# EAGLE board Remote (EAGLE 5.04)
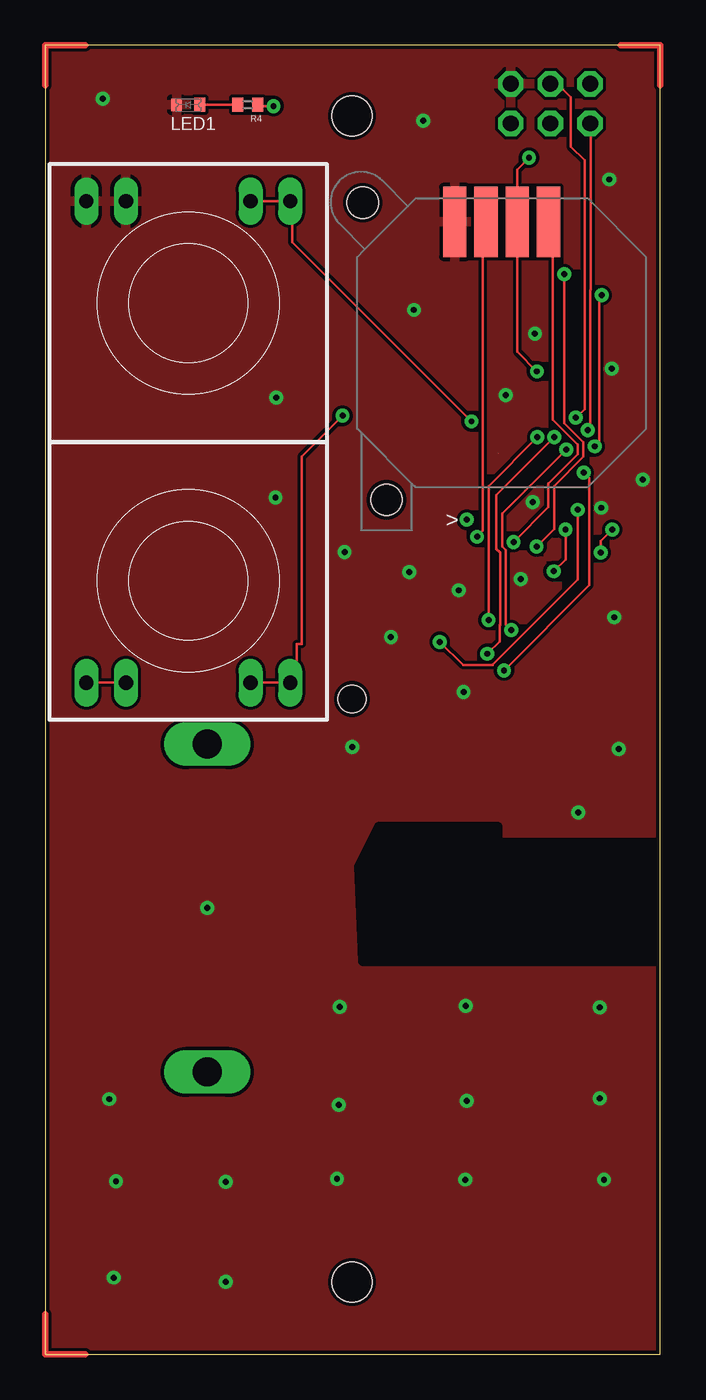
[diagram p0: board, top side]
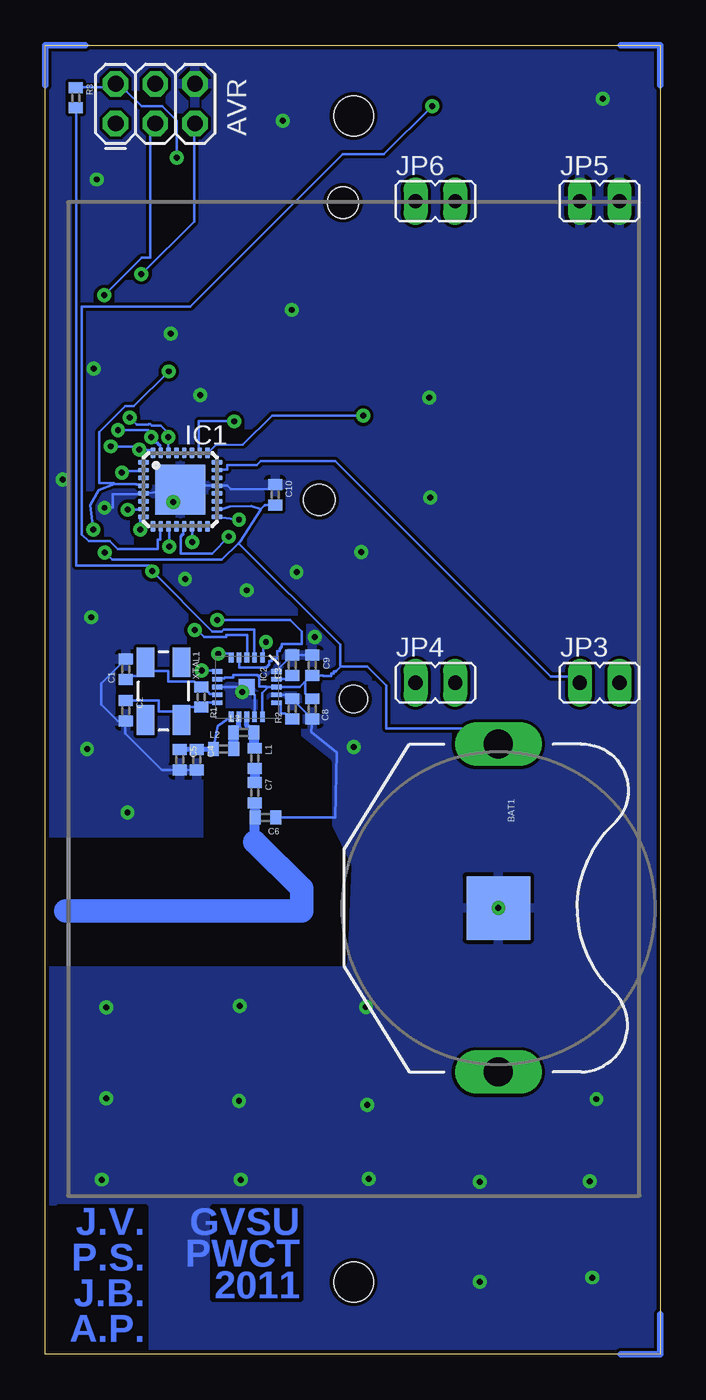
[diagram p1: board, bottom side, seen from below]

Size 39.37 x 83.82 mm. Coordinates in mm from the lower left corner, seen from the top.
Outline: 39.37,0 39.37,83.82 0,83.82 0,0 39.37,0
Copper layers (1*16): Top 0.035mm / dielectric 1.5mm / Bottom 0.035mm
Design rules "SparkFun *": minimum track width 6mil, minimum drill 15mil, track to track 8mil, track to pad 8mil, pad to pad 7mil, via to via 8mil, smd to smd 8mil, copper to edge 10mil, drill to drill 8mil, minimum pad ring 12mil, minimum via ring 10mil, stop-mask expansion 4mil, vias tented up to drill 20mil, thermal gap 10mil
Holes 1.78 mm at 19.63,41.96
Holes 2.54 mm at 19.63,79.3 19.63,4.62
tRestrict: area 20.1,25.1 to 39.4,33.8
bRestrict: area 20.1,25.1 to 39.4,40.9

## Footprints (pad centres in the part's own frame; a part is rotated, then mirrored left to right if it is on the bottom)
2X3 = drill 1.016 octagon: 1 0,0; 2 0,2.54; 3 2.54,0; 4 2.54,2.54; 5 5.08,0; 6 5.08,2.54
BATTCOM_20MM_PTH = drill 1.854 long: 1 -10.5,0; 3 10.5,0 | smd 4.064 x 4.064: 2 0,0
C0402 = smd 0.7 x 0.9: 1 -0.65,0; 2 0.65,0
MLF32-TH = smd 0.7 x 0.3: 1 -2.35,1.75; 2 -2.35,1.25; 3 -2.35,0.75; 4 -2.35,0.25; 5 -2.35,-0.25; 6 -2.35,-0.75; 7 -2.35,-1.25; 8 -2.35,-1.75; 17 2.35,-1.75; 18 2.35,-1.25; 19 2.35,-0.75; 20 2.35,-0.25; 21 2.35,0.25; 22 2.35,0.75; 23 2.35,1.25; 24 2.35,1.75 | smd 0.3 x 0.7: 9 -1.75,-2.35; 10 -1.25,-2.35; 11 -0.75,-2.35; 12 -0.25,-2.35; 13 0.25,-2.35; 14 0.75,-2.35; 15 1.25,-2.35; 16 1.75,-2.35; 25 1.75,2.35; 26 1.25,2.35; 27 0.75,2.35; 28 0.25,2.35; 29 -0.25,2.35; 30 -0.75,2.35; 31 -1.25,2.35; 32 -1.75,2.35 | smd 3.2 x 3.2: TH 0,0
QFN20 = smd 1 x 1: 0 0,0 | smd 0.65 x 0.3: 1 -1.9,1; 2 -1.9,0.5; 3 -1.9,0; 4 -1.9,-0.5; 5 -1.9,-1; 11 1.9,-1; 12 1.9,-0.5; 13 1.9,0; 14 1.9,0.5; 15 1.9,1 | smd 0.3 x 0.65: 6 -1,-1.9; 7 -0.5,-1.9; 8 0,-1.9; 9 0.5,-1.9; 10 1,-1.9; 16 1,1.9; 17 0.5,1.9; 18 0,1.9; 19 -0.5,1.9; 20 -1,1.9
JP1 = drill 0.914 long: 1 0,-1.27; 2 0,1.27
JOYSTICK-PSP1000 = smd 1.5 x 4.5: GND -3,7.75; VCC 1,7.75; X 3,7.75; Y -1,7.75 | hole 2: -8.89,8.985; -7.375,-10.06
0603LED = smd 0.9 x 0.7: 1 0,0.75 | smd 0.8 x 0.7: 2 0,-0.75
CRYSTAL-SMD-5X3 = smd 1.9 x 1.1: 1 -1.85,-1.15; 2 1.85,-1.15; 3 1.85,1.15; 4 -1.85,1.15

## Placement (x,y rotation side)
AVR  AVR_PRG  [2X3]  34.87,78.82 0 bottom
BAT1  20mm Coincell  [BATTCOM_20MM_PTH]  10.36,28.57 270 bottom
C1  22pF  [C0402]  34.22,43.87 90 bottom
C2  22pF  [C0402]  34.22,41.2 270 bottom
C3  33nF  [C0402]  23.55,44.12 90 bottom
C4  2.2nF  [C0402]  29.67,38.06 270 bottom
C5  4.7pF  [C0402]  30.78,38.06 270 bottom
C6  1.0pF  [C0402]  25.28,34.37 180 bottom
C7  1.5pF  [C0402]  25.96,35.96 270 bottom
C8  10nF  [C0402]  22.28,41.33 90 bottom
C9  1nF  [C0402]  22.28,44.12 270 bottom
C10  0.1uF  [C0402]  24.66,55.04 270 bottom
IC1  ATTINY261V-10MU  [MLF32-TH]  30.73,55.37 0 bottom
IC2  NRF24L01SMD  [QFN20]  26.48,42.72 270 bottom
JP3  [JP1]  3.89,43 270 bottom
JP4  [JP1]  14.4,43 270 bottom
JP5  [JP1]  3.89,73.84 270 bottom
JP6  [JP1]  14.4,73.84 270 bottom
JSTICK1  JOYSTICK-PSP1000  [JOYSTICK-PSP1000]  29.21,64.77 0 top
L1  3.9nH  [C0402]  25.96,38.16 270 bottom
L2  2.7nH  [C0402]  27.96,38.76 0 bottom
L3  8.2nH  [C0402]  26.68,39.8 0 bottom
LED1  CHIPLED  [0603LED]  9.14,80.01 270 top
R1  1M  [C0402]  29.4,42.09 270 bottom
R2  22K  [C0402]  23.55,41.33 90 bottom
R3  100K  [C0402]  37.41,80.47 270 bottom
R4  220  [C0402]  12.95,80.01 180 top
XTAL1  16MHz  [CRYSTAL-SMD-5X3]  31.81,42.47 270 bottom

## Library data of the parts
AVR BAT1 C1-C10 IC2 JSTICK1 L1-L3 R1-R4 XTAL1 = SparkFun
IC1 LED1 = PAS
JP3-JP6 = jumper

## Nets
ANT: C6.2 C7.2
CE: IC1.7 IC2.1
CS: IC1.8 IC2.2 R3.2
DOWN: IC1.23 JP3.1 JP3.2
GND: AVR.6 BAT1.2 C1.2 C2.2 C3.2 C4.2 C5.2 C6.1 C8.1 C9.1 C10.1 IC1.5 IC1.21 IC1.TH IC2.0 IC2.8 IC2.14 IC2.17 IC2.20 JP5.1 JP5.2 JSTICK1.GND LED1.2 R2.2
IRQ: IC1.2 IC2.6
JSX: IC1.14 JSTICK1.X
JSY: IC1.13 JSTICK1.Y
MISO: AVR.1 IC1.31 IC2.5
MOSI: AVR.4 IC1.30 IC2.4
N$1: C1.1 IC2.9 R1.1 XTAL1.1
N$2: C2.1 IC2.10 R1.2 XTAL1.3
N$3: IC2.12 L2.2 L3.1
N$4: IC2.16 R2.1
N$5: C3.1 IC2.19
N$6: IC2.13 L1.1 L3.2
N$7: C4.1 C5.1 IC2.11 L2.1
N$8: LED1.1 R4.2
N$9: C7.1 L1.2
REDBUTTON: IC1.26 JP6.1 JP6.2
RST: AVR.5 IC1.11
SCK: AVR.3 IC1.32 IC2.3
SPARE: IC1.17
STATUS: IC1.10 R4.1
UP: IC1.25 JP4.1 JP4.2
VCC: AVR.2 BAT1.1 C8.2 C9.2 C10.2 IC1.4 IC1.18 IC2.7 IC2.15 IC2.18 JSTICK1.VCC R3.1

## Tracks (layer width: path | path; a pad name or v marks a point on that pad's centre or on a via)
ANT
  Bottom 0.635: 25.97,32.81 25.97,34.37 C6.2 25.93,35.31 C7.2
  Bottom 1.5: 25.97,32.81 22.97,29.81 22.97,28.38 38.06,28.38
CE  (via drill 0.38)
  Top 0.152: v25.25,45.62 26.75,44.12 28.65,44.12 28.65,44.17 34.09,49.61 v34.09,54.08
  Bottom 0.152: v25.25,45.62 25.43,45.62 25.43,44.93 IC2.1 | v34.09,54.08 33.43,54.08 IC1.7
CS  (via drill 0.38)
  Top 0.152: v32.54,50.14 33.3,50.9 v33.3,52.81
  Bottom 0.152: v33.3,52.81 33.3,53.49 IC1.8 | IC2.2 25.98,44.93 25.98,46.41 27.94,46.41 28.07,46.28 28.68,46.28 v32.54,50.14 32.77,50.52 37.39,50.52 37.39,79.48 R3.2
DOWN
  Top 0.152: JP3.2 3.35,43 4.42,43 JP3.1
  Bottom 0.152: IC1.23 28.04,56.67 27.74,56.67 27.74,56.95 25.83,56.95 25.58,57.2 20.83,57.2 7.01,43.38 5.89,43.38 JP3.1
GND  (via drill 0.38)
  Bottom 0.152: IC2.17 24.26,42.22 24,42.22 R2.2 23.55,41.95 C8.1 22.35,39.85 20.73,38.53 20.8,34.37 C6.1 | IC2.20 | IC2.20 24.58,43.88 | IC2.14 25.98,42.22 IC2.0 | IC2.0 IC2.8 | IC2.20 24.59,43.74 C3.2 C9.1 | C1.2 35.79,42.95 35.79,41.6 34.73,40.55 C2.2 34.27,40.51 34.27,39.75 31.93,37.41 C5.2 C4.2 | C10.1 24.96,55.4 27.51,55.4 27.73,55.62 IC1.21 30.48,55.62 IC1.TH IC1.5 33.08,55.09 35.05,55.09 35.05,54.23 35.59,54.23 | IC2.0 v26.77,42.42
  other vias: 19.63,38.89 22.12,45.92 36.42,47.19 36.7,38.76 34.11,34.7 35.48,22.2 26.92,22.3 18.85,22.25 18.77,15.98 26.97,16.23 35.48,16.38 35.76,11.18 26.87,11.18 18.67,11.23 11.56,11.02 4.09,16.33 4.52,11.07 11.56,4.62 4.37,4.9 23.29,50.09 19.15,51.36 14.73,54.86 14.78,61.26 23.6,66.88 38.25,56.01 36.27,63.12 24.18,78.99 35.59,54.2 31.34,65.35 29.46,61.42 31.19,54.56 26.47,48.92 30.43,49.63 10.36,28.57 3.68,80.42 36.09,75.23
  pour Top: 39.57,-5.33 44.65,-0.25 44.65,83.57 39.57,88.65 -1.07,88.65 -6.15,83.57 -6.15,-0.25 -1.07,-5.33
  pour Bottom: 39.57,-5.33 44.65,-0.25 44.65,83.57 39.57,88.65 -1.07,88.65 -6.15,83.57 -6.15,-0.25 -1.07,-5.33
IRQ  (via drill 0.38)
  Top 0.152: v29.36,43.79 34.82,49.25 34.82,56.11 v34.47,56.46
  Bottom 0.152: v29.36,43.79 28.68,43.79 IC2.6 | v34.47,56.46 34.47,56.57 33.43,56.57 IC1.2
JSX  (via drill 0.38)
  Top 0.152: v29.97,52.02 32.21,54.25 32.21,55.75 34.09,57.63 34.09,58.27 32.49,59.87 32.49,70.28 JSTICK1.X
  Bottom 0.152: v29.97,52.02 29.97,52.68 IC1.14
JSY  (via drill 0.38)
  Top 0.152: v27.64,52.35 28.02,52.73 28.02,70.28 JSTICK1.Y
  Bottom 0.152: v27.64,52.35 28.7,51.28 30.71,51.28 30.71,52.4 30.63,52.4 30.63,52.5 30.53,52.5 30.53,52.68 IC1.13
MISO  (via drill 0.38)
  Top 0.152: v28.3,44.86 29.08,45.64 29.08,46.69 29.11,46.71 29.11,51.33 28.88,51.56 28.88,55.02 v32.59,58.73 | v34.72,59.18 34.87,59.33 34.87,68.12 34.92,68.17 34.92,78.03 AVR.1
  Bottom 0.152: v28.3,44.86 27.61,44.86 IC2.5 | IC1.31 32.03,58.06 32.03,58.22 32.11,58.22 32.11,58.29 32.18,58.29 32.18,58.37 32.59,58.37 v32.59,58.73 32.77,59.16 32.79,59.18 v34.72,59.18
MOSI  (via drill 0.38)
  Top 0.152: v28.37,47.02 28.4,47.04 28.4,50.49 28.37,50.52 28.37,55.6 v31.5,58.73 | v33.96,59.97 34.52,60.53 34.52,76.45 33.63,77.34 33.63,80.49 33.12,81 AVR.4
  Bottom 0.152: v28.37,47.02 23.7,47.02 22.96,46.28 22.96,45.47 24.23,45.47 24.23,45.29 24.31,45.29 24.31,45.19 24.36,45.19 24.36,45.03 24.51,45.03 24.51,44.55 24.89,44.55 24.89,44.4 25.04,44.4 25.04,44.15 25.07,44.15 25.07,44.12 25.09,44.12 25.09,44.09 25.12,44.09 25.12,44.07 25.15,44.07 25.15,44.04 25.17,44.04 25.17,44.02 25.25,44.02 25.25,43.97 26.98,43.97 26.98,44.32 IC2.4 | IC1.30 31.5,58.06 v31.5,58.73 31.67,59.16 31.98,59.46 32.56,59.46 32.66,59.56 32.77,59.56 32.79,59.54 33.53,59.54 v33.96,59.97
N$1
  Bottom 0.152: C1.1 33.78,43.43 33.5,43.43 XTAL1.1 32.41,43.76 31.5,43.76 31.5,43.08 29.84,43.08 R1.1 28.96,42.39 28.85,42.29 28.68,42.29 IC2.9
N$2
  Bottom 0.152: IC2.10 28.68,41.73 28.96,41.73 R1.2 29.84,41.45 30.12,41.45 XTAL1.3 31.19,41.17 32.11,41.17 32.11,41.86 33.78,41.86 C2.1
N$3
  Bottom 0.305: L3.1 26.98,40.15 IC2.12
  Bottom 0.635: L2.2 27.32,38.76 L3.1
N$4
  Bottom 0.152: IC2.16 24.31,41.58 24.31,41.02 24,41.02 R2.1
N$5
  Bottom 0.152: IC2.19 24.26,43.23 24,43.23 C3.1
N$6
  Bottom 0.305: L3.2 26.48,40.25 IC2.13
  Bottom 0.635: L1.1 26.02,38.81 L3.2
N$7
  Bottom 0.152: L2.1 28.32,40.23 IC2.11
  Bottom 0.305: L2.1 28.65,38.71 C4.1 C5.1
N$8
  Top 0.152: LED1.1 10.24,80.01 11.96,80.01 R4.2
N$9
  Bottom 0.635: L1.2 C7.1
N$10
  Bottom 0.406: 0,81.28 0,83.82 2.54,83.82
N$11
  Top 0.406: 0,81.28 0,83.82 2.54,83.82
N$12
  Top 0.406: 0,2.54 0,0 2.54,0
N$13
  Bottom 0.406: 0,2.54 0,0 2.54,0
N$14
  Bottom 0.406: 36.83,83.82 39.37,83.82 39.37,81.28
N$15
  Top 0.406: 36.83,83.82 39.37,83.82 39.37,81.28
N$17  (via drill 0.38)
  Bottom 0.152: v26.98,53.44 28.37,53.62
REDBUTTON  (via drill 0.38)
  Top 0.152: JP6.2 13.87,73.84 14.94,73.84 JP6.1 15.8,72.34 15.8,71.22 v27.28,59.74
  Bottom 0.152: v27.28,59.74 29.54,59.74 29.54,58.06 IC1.26
RST  (via drill 0.38)
  Top 0.152: v31.45,51.71 32.56,52.83 32.56,55.6 34.44,57.48 34.44,58.42 33.22,59.64 v33.22,69.16
  Bottom 0.152: v31.45,51.71 31.45,52.68 IC1.11 | v33.22,69.16 29.84,72.54 29.84,78.03 AVR.5
SCK  (via drill 0.38)
  Top 0.152: v29.82,46.38 29.46,46.74 29.46,51.49 29.23,51.71 29.23,53.82 v33.35,57.94 | v35.61,67.82 35.46,67.67 35.46,58.42 v35.18,58.14
  Bottom 0.152: v29.82,46.38 29.67,46.38 29.21,45.92 27.79,45.92 27.79,46.05 26.44,46.05 26.44,44.93 IC2.3 | IC1.32 32.61,57.91 33.35,57.91 v33.35,57.94 33.78,58.12 35.15,58.12 v35.18,58.14 | v35.61,67.82 33.2,70.23 32.66,70.23 32.66,78.03 AVR.3
STATUS  (via drill 0.38)
  Top 0.152: v14.61,79.93 13.95,79.93 R4.1
  Bottom 0.152: v14.61,79.93 17.7,76.83 20.34,76.83 30.1,67.08 37.03,67.08 37.03,52.5 36.6,52.07 35.26,52.07 34.75,51.56 32.18,51.56 32.18,52.17 32.03,52.17 32.03,52.68 IC1.10
UP  (via drill 0.38)  (1 unrouted)
  Top 0.152: JP4.2 13.87,43 14.94,43 JP4.1 16.1,44.4 16.1,45.47 16.41,45.47 16.41,57.48 v19.02,60.1
  Bottom 0.152: v19.02,60.1 24.84,60.12 26.72,58.24 28.47,58.22 IC1.25
VCC  (via drill 0.38)
  Top 0.152: v30.96,76.63 30.2,75.87 30.2,74.75 JSTICK1.VCC 30.2,70.28 30.2,64.21 v31.47,62.94 | v36.3,52.81 35.56,52.07 v35.56,51.33
  Bottom 0.152: R3.1 36.98,81.13 36.73,81.13 36.73,81.15 35.66,81.15 AVR.2 34.19,80.9 33.2,79.91 31.88,79.91 30.96,78.99 v30.96,76.63 | 25.58,54.13 26.19,54.3 27.56,54.28 28.04,54.13 IC1.18 | 25.58,54.13 25.32,54.38 | 25.32,54.38 25.32,54.36 25.32,54.38 | 25.32,54.38 25.09,54.38 C10.2 | 34.95,55.73 33.55,55.73 33.55,55.7 33.53,55.7 33.53,55.68 33.43,55.68 IC1.4 | 34.95,55.73 35.97,55.35 36.5,54.38 v36.3,52.81 | v35.56,51.33 35.1,50.88 28.07,50.88 27,51.94 | 27,51.94 26.9,52.05 25.58,54.08 25.58,54.13 | 22.78,43.03 22.68,43.13 C9.2 21.84,43.46 21.59,43.46 21.59,43.43 21.06,43.43 21.06,43.59 20.9,43.59 20.9,43.71 20.78,43.71 20.78,43.74 20.75,43.74 20.45,44.04 | 22.78,43.03 23.09,42.72 24.26,42.72 IC2.18 24.89,42.72 25.09,42.72 | 25.09,42.72 25.25,42.72 25.25,42.75 25.68,42.75 25.68,43.36 25.7,43.36 25.7,43.46 25.81,43.46 25.81,43.51 27.33,43.51 27.33,43.33 27.89,43.33 27.89,43.31 27.91,43.31 27.91,43.28 28.07,43.28 IC2.7 | C8.2 22.73,42.32 22.73,42.98 22.78,43.03 | 20.45,44.04 18.77,44.04 17.55,42.82 17.55,40.06 12.72,40.06 BAT1.1 | 27,51.94 26.95,51.89 20.5,45.44 20.5,44.09 20.45,44.04 | v31.47,62.94 33.71,60.71 34.27,60.71 35.92,59.05 35.92,55.78 35,55.78 34.95,55.73 | IC2.15 25.48,42.34 25.09,42.72

## Text on the board
Bottom: GVSU | J.V. | PWCT | P.S. | 2011 | J.B. | A.P.
tNames: >
bDocu: B1